# Allegro board ASR6601QFN48_Module_V10_210527.brd
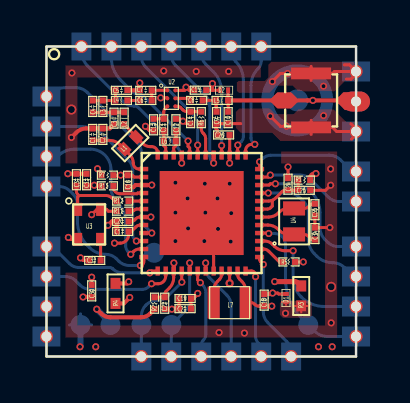
[diagram p0: board, top side]
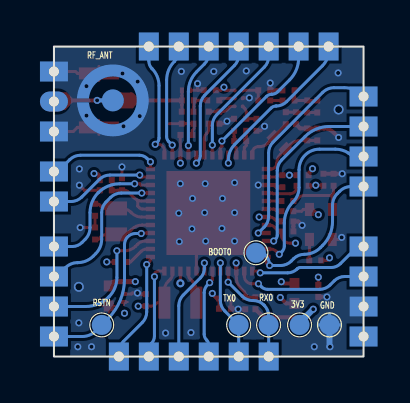
[diagram p1: board, bottom side, seen from below]

Outline 15.5 x 15.5 mm; copper layers: TOP, GND, VCC, BOTTOM. Coordinates in mm from the lower left corner of the outline.
Outline path: rectangle 0,0 15.5,15.5

## Placement (name value [footprint] x y rotation side)
C1  47nF  [C0201]  2.32 11.1 270 top
C2  82pF  [C0201]  2.82 11.1 270 top
C3  9.0pF  [C0201]  3.38 11.92 90 top
C4  3.9pF  [C0201]  2.32 12.5 90 top
C5  12pF  [C0201]  3.75 13.31 0 top
C6  100pF  [C0201]  4.97 12.8 0 top
C7  4.7pF  [C0201]  4.97 13.31 0 top
C8  100pF  [C0201]  7.52 12.81 0 top
C9  NC  [C0201]  8.51 11.94 90 top
C10  NC  [C0201]  9.1 11.94 90 top
C11  4.7pF  [C0201]  5.87 11.59 90 top
C12  3.9pF  [C0201]  6.48 11.59 90 top
C13  1pF  [C0201]  5.36 11.59 90 top
C14  100pF  [C0201]  7.22 11.94 270 top
C15  100pF  [C0201]  7.7 13.31 180 top
C16  0.1uF  [C0201]  4.07 8.76 270 top
C17  0.1uF  [C0201]  3.81 6.25 180 top
C18  0.47uF  [C0201]  10.9 2.82 90 top
C19  0.1uF  [C0201]  6.94 2.9 0 top
C20  0.1uF  [C0201]  3.81 6.76 0 top
C21  2.2uF  [C0201]  6.94 2.39 0 top
C22  0.1uF  [C0201]  5.92 2.67 90 top
C24  0.01uF  [C0201]  12.09 8.61 90 top
C25  2.2uF  [C0201]  12.91 8.31 0 top
C26  0.1uF  [C0201]  8.87 11.08 0 top
C30  0R(0.1uF)  [C0201]  2.26 3.28 270 top
C31  NC(10pF)  [C0201]  1.5 8.84 90 top
C32  0R  [C0201]  2.42 4.8 180 top
C33  NC(10pF)  [C0201]  2.01 8.84 90 top
C34  NC(10pF)  [C0201]  13.44 6.15 90 top
C35  NC(10pF)  [C0201]  13.44 7.34 90 top
D1  PESD3V3Z1BSF  [DSN0603_2N_MM]  11.99 2.92 270 top
D2  PESD5V0H1BSF  [DSN0603_2N_MM]  8.89 13.31 0 top
J1  -  [IPEX]  13.25 12.8 180 top
J2  HDR  [ASR6601QFN48_1600X1600_30N3_MM]  7.75 7.75 0 top
L1  56nH  [L0402]  4.2 10.67 225 top
L2  1.8nH  [L0201]  3.89 11.92 90 top
L3  7.5nH  [L0201]  2.82 12.5 90 top
L4  15nH  [L0201]  3.75 12.8 0 top
L5  0R  [L0201]  8.79 12.81 0 top
L6  33nH  [L0201]  6.18 10.77 180 top
L7  15uH  [L2016]  9.17 2.69 0 top
R1  0R  [R0201]  12.91 8.82 180 top
R2  0R  [R0201]  5.41 2.67 90 top
R3  0R  [R0402]  12.75 3.03 90 top
R4  0R  [R0402]  3.46 3.15 270 top
R5  100R  [R0201]  12.14 4.73 0 top
R6  100R  [R0201]  7.75 11.94 270 top
R7  NC(0R)  [R0201]  3.05 9.07 180 top
R11  NC(0R)  [R0201]  3.81 7.26 0 top
R12  0R  [R0201]  3.81 7.77 0 top
R13  0R  [R0201]  3.05 8.53 0 top
TP1  TP  [TP_SMD180CR120_110C_MM]  12.55 12.81 0 bottom
TP2  TP_1MM  [TP_SMD100C100_MM]  3.2 1.58 180 bottom
TP3  TP_1MM  [TP_SMD100C100_MM]  1.71 1.58 180 bottom
TP4  TP_1MM  [TP_SMD100C100_MM]  5.39 5.19 180 bottom
TP5  TP_1MM  [TP_SMD100C100_MM]  13.11 1.58 180 bottom
TP6  TP_1MM  [TP_SMD100C100_MM]  4.75 1.58 180 bottom
TP7  TP_1MM  [TP_SMD100C100_MM]  6.25 1.58 180 bottom
U1  ASR6601QFN48  [ASR6501_QFN40P_600X600_48N_MM]  7.77 7.17 180 top
U2  XMSSJR6G0BA-093  [QFN40P_110X70_6N_MM]  6.25 12.91 0 top
U3  TCXO/XO_32M  [OSC_SMD200X160_4N_MM]  2.14 6.6 270 top
U4  XO_32.768K  [XTAL_SMD160X100_2N_MM]  12.4 6.76 90 top

## Library data of the parts
C1-C22 C24-C26 C30-C35 = RCL_CAP_NP
D1 D2 = TVS-BI
J1 = UFLR_0
J2 = CN_10
L1-L7 = RCL_IND
R1-R7 R11-R13 = RCL_RES
TP1 = UFLR_1
TP2-TP7 = TP_SMT
U1 = ASR6505_9
U2 = MXD8625C_0
U3 = TCXO_32M
U4 = XO

## Footprints (pads in the part's own frame, mm; a bottom-side part is the same pattern mirrored in y, then rotated)
ASR6501_QFN40P_600X600_48N_MM
  rect 0.45x0.22 smd: 1(2.9,-2.2) 2(2.9,-1.8) 3(2.9,-1.4) 4(2.9,-1) 5(2.9,-0.6) 6(2.9,-0.2) 7(2.9,0.2) 8(2.9,0.6) 9(2.9,1) 10(2.9,1.4) 11(2.9,1.8) 12(2.9,2.2) 25(-2.9,2.2) 26(-2.9,1.8) 27(-2.9,1.4) 28(-2.9,1) 29(-2.9,0.6) 30(-2.9,0.2) 31(-2.9,-0.2) 32(-2.9,-0.6) 33(-2.9,-1) 34(-2.9,-1.4) 35(-2.9,-1.8) 36(-2.9,-2.2)
  rect 0.22x0.45 smd: 13(2.2,2.9) 14(1.8,2.9) 15(1.4,2.9) 16(1,2.9) 17(0.6,2.9) 18(0.2,2.9) 19(-0.2,2.9) 20(-0.6,2.9) 21(-1,2.9) 22(-1.4,2.9) 23(-1.8,2.9) 24(-2.2,2.9) 37(-2.2,-2.9) 38(-1.8,-2.9) 39(-1.4,-2.9) 40(-1,-2.9) 41(-0.6,-2.9) 42(-0.2,-2.9) 43(0.2,-2.9) 44(0.6,-2.9) 45(1,-2.9) 46(1.4,-2.9) 47(1.8,-2.9) 48(2.2,-2.9)
  rect 4.2x4.2 smd: 49(0,0)
ASR6601QFN48_1600X1600_30N3_MM
  round 0.65 hole 0.5: 1(-6,7.75) 2(-4.5,7.75) 3(-3,7.75) 4(-1.5,7.75) 5(0,7.75) 6(1.5,7.75) 7(3,7.75) 8(7.75,6.5) 10(7.75,3.5) 11(7.75,1.5) 12(7.75,0) 13(7.75,-2.25) 14(7.75,-3.75) 15(7.75,-5.25) 16(7.75,-6.75) 17(4.5,-7.75) 18(3,-7.75) 19(1.5,-7.75) 20(0,-7.75) 21(-1.5,-7.75) 22(-3,-7.75) 23(-7.75,-6.75) 24(-7.75,-5.25) 25(-7.75,-3.75) 26(-7.75,-2.25) 27(-7.75,0.75) 28(-7.75,2.25) 29(-7.75,3.75) 30(-7.75,5.25)
  oval 1.4x1 hole 0.5: 9(7.75,5)
C0201
  rect 0.3x0.3 smd: 1(-0.3,0) 2(0.3,0)
DSN0603_2N_MM
  rect 0.2x0.28 smd: 1(-0.2,0) 2(0.2,0)
IPEX
  rect 2x0.6 smd: 1(0,1.35) 2(0,-1.35)
  rect 0.7x0.8 smd: 3(1.35,0)
L0201
  rect 0.3x0.3 smd: 1(-0.3,0) 2(0.3,0)
L0402
  rect 0.47x0.58 smd: 1(-0.425,0) 2(0.425,0)
L2016
  rect 0.6x1.6 smd: 1(-0.8,0) 2(0.8,0)
OSC_SMD200X160_4N_MM
  rect 0.65x0.45 smd: 1(-0.75,-0.575) 2(0.75,-0.575) 3(0.75,0.575) 4(-0.75,0.575)
QFN40P_110X70_6N_MM
  round 0.2 smd: 1(-0.2,0.4) 2(-0.2,0) 3(-0.2,-0.4) 4(0.2,-0.4) 5(0.2,0) 6(0.2,0.4)
R0201
  rect 0.3x0.3 smd: 1(-0.3,0) 2(0.3,0)
R0402
  rect 0.55x0.5 smd: 1(-0.5,0) 2(0.5,0)
TP_SMD100C100_MM
  round 1 smd: 1(0,0)
TP_SMD180CR120_110C_MM
  round 1.1 smd: 1(0,0)
  custom 3.597x3.6 smd: 2(0,0)
XTAL_SMD160X100_2N_MM
  rect 0.7x1.1 smd: 1(-0.65,0) 2(0.65,0)

## Nets
GND: C1.1 C2.1 C3.1 C5.2 C7.1 C9.1 C10.1 C12.2 C13.1 C14.2 C15.1 C16.2 C17.2 C18.2 C19.1 C20.1 C21.1 C22.1 C24.2 C25.2 C26.1 C30.2 C31.2 C33.2 C34.2 C35.1 D1.1 D2.1 J1.1 J1.2 J2.8 J2.10 J2.24 TP1.2 TP3.1(TP) U1.3(GND_PLL) U1.20(GND_DCC) U1.49(GND) U2.2(GND) U3.2(GND#2)
VCC_3V3: D1.2 J2.23 R1.1 R2.1 R3.1 TP2.1(TP)
VDD_IN: C16.1 R4.1 R7.1 U1.2(VDD_IN)
VDD_RF: C19.2 C20.2 C21.2 R3.2 R4.2 U1.7(VBAT_RF) U1.22(VBAT_DCC)
VDDA: C24.1 C25.1 R1.2 U1.31(VBAT_RTC) U1.32(VBAT_ANA)
VDDD: C22.2 C26.2 R2.2 U1.15(VBAT_ESD0) U1.39(VBAT_ESD3)
ANT_SW_CTRL: R5.1 U1.26(GPIO59/LORAC_RF_SW)
GPIO00: J2.29 U1.10(GPIO00/SPI_CLK)
GPIO01: J2.30 U1.9(GPIO01/SPI_SEL)
GPIO02: J2.27 TP4.1(TP) U1.12(GPIO02/SPI_MISO)
GPIO03: J2.28 U1.11(GPIO03/SPI_MOSI)
GPIO04: J2.11 U1.36(GPIO04/UART1_TX)
GPIO05: J2.12 U1.35(GPIO05/UART1_RX)
GPIO06: J2.26 U1.13(GPIO06/SWD_DAT)
GPIO07: J2.25 U1.14(GPIO07/SWD_CLK)
GPIO08: J2.13 U1.34(GPIO08/ADC_IN1)
GPIO09: J2.7 U1.37(GPIO09/DAC_OUT)
GPIO10: R6.2 U1.42(GPIO10/OPA0_OUT)
GPIO11: J2.14 U1.33(GPIO11/ADC_IN0)
GPIO14: J2.20 U1.18(GPIO14/I2C_CLK)
GPIO15: J2.19 U1.19(GPIO15/I2C_DAT)
GPIO16: J2.22 TP6.1(TP) U1.16(GPIO16/UART0_RX)
GPIO17: J2.21 TP7.1(TP) U1.17(GPIO17/UART0_TX)
GPIO32: J2.1 U1.45(GPIO32/COMP1_OUT)
GPIO33: J2.2 U1.44(GPIO33/COMP1_INN)
GPIO37: J2.3 U1.43(GPIO37/COMP1_INP)
GPIO44: J2.4 U1.41(GPIO44/OPA0_INN)
GPIO45: J2.5 U1.40(GPIO45/OPA0_INP)
GPIO47: J2.6 U1.38(GPIO47/LPUART_TX)
GPIO58: J2.15 U1.27(GPIO58/LP_TIMER)
GPIO60: J2.17 U1.25(GPIO60/LPUART_RX)
GPIO62: J2.18 U1.24(GPIO62/WKUP)
PWR_TCXO: R11.2 U1.6(PWR_TCXO)
RF_ANT: C10.2 D2.2 J1.3 J2.9 L5.2 TP1.1
RFI_N: C11.1 L6.2 U1.47(RFI_N)
RFI_P: C12.1 L6.1 U1.46(RFI_P)
RFO: L1.1 L2.1 U1.48(RFO)
RSTN: J2.16 TP5.1(TP) U1.28(RSTN)
VR_PA: C1.2 C2.2 L1.2 U1.1(VR_PA)
VREG: C17.1 C18.1 L7.2 R7.2 U1.8(VDCC_RF) U1.23(VREG)
XO32K_IN: C34.1 U1.29(XO32K_IN) U4.1(XTA)
XO32K_OUT: C35.2 U1.30(XO32K_OUT) U4.2(XTB)
XTA: R13.2 U1.4(XTA)
XTB: R12.2 U1.5(XTB)
N16688294: C30.1 R11.1 U3.4(VCC)
N16688298: C31.1 R12.1 U3.1(GND#1)
N16688382: C32.2 C33.1 R13.1
N16688514: C32.1 U3.3(VOUT)
N16776961: L7.1 U1.21(DCC_SW)
N16801239: C8.2 C9.2 L5.1
N16801249: C11.2 C13.2 U2.3(RF1)
N16801277: C6.2 C7.2 U2.1(RF2)
N16801301: C15.2 R5.2 U2.6(V1)
N16801306: C3.2 C4.1 L2.2 L3.1
N16801308: C4.2 C5.1 L3.2 L4.1
N16801347: C14.1 R6.1 U2.4(VDD)
N16801468: C8.1 U2.5(ANT)
N16801497: C6.1 L4.2

## Via types
v1: diameter 0.356, hole 0.203, TOP to BOTTOM, 93 vias
v2: diameter 0.406, hole 0.203, TOP to BOTTOM, 1 via
v3: diameter 0.5, hole 0.35, TOP to BOTTOM, 2 vias

## Routing (per net, layer and track width the routed paths; a pad name or vN(x,y) marks a point on that pad's centre or on a via; arc(x,y) is an arc through that point)
GND: length 42.1
  TOP w0.15: J2.8 15.5,14.13 15.24,13.87 15.02,13.87 ; J2.8 14.42,14.25 14.32,14.15 J1.2 ; J2.8 15.17,14.58 14.91,14.58 ; 8.31,13.31 D2.1 ; 8.31,13.31 v1(8.31,13.64) ; 8.31,13.31 C15.1 ; J2.10 15.5,11.38 15.24,11.64 ; J2.10 15.5,11.11 15.27,10.88 ; J2.10 14.53,11.25 14.32,11.46 J1.1 ; U2.2 6.03,12.93 v1(5.72,12.93) ; D1.1 11.62,3.12 11.58,3.17 v1(11.32,3.17) ; 13.25,13.8 J1.2 ; J1.2 12.07,14.15 v1(12.07,14.15) 11.71,14.15 v1(11.31,13.75) ; J1.2 13.25,14.51 ; v1(14.19,6.45) C34.2 C35.1 ; v1(4.96,11.51) 4.96,11.49 5.16,11.29 C13.1 ; C14.2 7.03,11.64 arc(6.96,11.66) 6.91,11.69 v1(6.84,11.76) 6.76,11.84 arc(6.71,11.87) 6.64,11.89 C12.2 ; U1.20 8.37,4.99 arc(8.31,5.28) 8.15,5.52 v1(7.9,5.77) ; v1(1.1,5.95) 1.2,5.85 U3.2 ; J1.1 13.25,11.81 ; J1.1 13.25,11.1 ; J1.1 12.07,11.46 v1(12.02,11.51) 11.71,11.51 v1(11.21,12.02) ; C19.1 C21.1 6.41,2.39 6.39,2.37 v1(6.28,2.37) C22.1 ; C24.2 v1(12.09,9.48) ; C26.1 8.57,11.3 8.49,11.38 8.49,11.64 C9.1 C10.1 9.73,11.64 ; C25.2 13.97,8.31 v1(14.23,8.56)
  TOP w0.2: v1(1.07,9.14) C31.2 C33.2 ; v1(1.25,10.95) 1.5,11.2 arc(1.72,11.35) 1.99,11.4 C1.1 C2.1 3.17,11.4 C3.1 ; v1(11.32,3.17) 11.27,3.12 C18.2 ; C17.2 3.51,6.5 3.51,6.5 C20.1 3.28,6.76 v1(3.08,6.56) ; v1(4.67,13.67) C7.1 C5.2 ; v1(1.83,2.98) 1.84,2.98 C30.2 ; C16.2 4.35,8.46 4.46,8.57 U1.3 v1(5.27,8.57)
  GND w0.15: 0.51,1.99 0,2.5 J2.24 0.01,2.5 ; 0.01,2.5 0.78,2.5 ; 0.01,2.5 0.54,3.03 ; 15.49,14.25 14.71,14.25 ; 15.49,14.25 J2.8 15.5,14.25 14.99,14.76 ; 15.49,14.25 14.94,13.69 ; 15.49,11.25 14.56,11.25 ; 15.49,11.25 J2.10 15.5,11.25 14.86,11.89 ; 15.49,11.25 14.81,10.57
  BOTTOM w0.15: 1.15,1.58 TP3.1 ; TP3.1 2.26,1.58 ; TP3.1 1.71,2.13
  BOTTOM w0.3: TP3.1 1.71,0.49 v1(1.68,0.49)
  vias: v1(1.27,14.18) v1(2.47,0.49) v1(5.87,14.28) v1(6.46,8.69) v1(6.46,7.19) v1(6.46,5.77) v1(7.07,7.9) v1(7.09,6.4) v1(7.5,14.25) v1(7.93,8.64) v1(7.95,7.19) v1(8.56,7.9) v1(8.59,6.38) v1(8.64,1.2) v1(9.12,14.25) v1(9.17,8.64) v1(9.25,7.17) v1(9.22,5.74) v1(9.91,1.17) v1(13.62,0.49) v1(13.87,13.52) v1(13.87,12.04) v1(14.23,9.38) v1(14.25,1.68) v1(14.3,0.49) v3(1.25,12.35) v3(14.25,3.48)
VCC_3V3: length 27.9
  TOP w0.1: 12.45,2.53 R3.1 ; R3.1 12.75,2.2 ; R3.1 13.06,2.53 ; 11.8,2.73 11.99,2.73 ; 11.99,2.73 11.99,2.57 ; 11.99,2.73 12.18,2.73
  TOP w0.2: v1(2.52,2.37) 2.74,2.15 arc(2.95,2.01) 3.19,1.96 4.74,1.96 arc(4.99,2.01) 5.2,2.15 R2.1 ; v1(13.49,9.15) 13.41,9.15 arc(13.27,9.09) 13.21,8.95 R1.1
  VCC w0.3: 11.97,1.67 11.94,1.71 2.52,1.71 ; 11.97,1.67 11.97,1.83 11.97,1.84 v1(11.97,2.16) ; 11.97,1.67 arc(12.48,1.78) 12.91,2.06 13.04,2.2 arc(13.37,2.69) 13.49,3.28 v1(13.49,9.15) ; 2.52,1.71 v1(2.52,2.37) ; 2.52,1.71 1.99,1.71 arc(1.47,1.6) 1.03,1.31 0.95,1.23 arc(0.7,1.06) 0.39,1 J2.23
  BOTTOM w0.3: v1(2.52,2.37) 2.9,1.99 2.92,1.99 3.12,1.79 arc(3.18,1.69) TP2.1
VDD_IN: length 8
  TOP w0.15: R7.1 v1(3.71,9.07) 3.72,9.06 C16.1 4.29,9.06 4.38,8.97 U1.2
  TOP w0.2: v1(4.12,3.74) 4.03,3.65 R4.1
  VCC w0.2: v1(3.71,9.07) 3.89,8.89 arc(4,8.72) 4.04,8.52 4.04,5.88 arc(3.99,5.64) 3.85,5.43 3.83,5.4 arc(3.69,5.19) 3.64,4.94 3.64,4.54 arc(3.7,4.24) 3.86,3.99 v1(4.12,3.74)
VDD_RF: length 17.1
  TOP w0.15: C20.2 4.24,6.76 arc(4.33,6.77) 4.41,6.82 4.46,6.87 arc(4.57,6.95) 4.69,6.97 U1.7 v1(5.23,6.97) ; C21.2 C19.2 7.36,2.9 7.57,3.11 v1(7.57,3.15) ; U1.22 v2(9.17,3.66)
  TOP w0.2: R4.2 3.87,2.65 v1(4.17,2.95)
  TOP w0.25: R3.2 12.63,3.65 arc(12.53,3.72) 12.41,3.74 v1(11.43,3.74)
  VCC w0.2: 9.17,3.15 10.14,3.15 arc(10.44,3.21) 10.7,3.39 10.94,3.63 arc(11.07,3.71) 11.22,3.74 v1(11.43,3.74) ; 9.17,3.15 v1(7.57,3.15) 5.8,3.15 ; 9.17,3.15 9.17,3.36 9.17,3.36 v2(9.17,3.66) ; v1(5.23,6.97) 5.55,6.65 arc(5.73,6.38) 5.8,6.06 5.8,3.15 ; 5.8,3.15 4.5,3.15 arc(4.38,3.13) 4.29,3.07 v1(4.17,2.95)
VDDA: length 3.6
  TOP w0.15: R1.2 C25.1 12.32,8.31 12.32,8.31 C24.1 11.97,8.31 arc(11.88,8.3) 11.8,8.25 11.5,7.94 arc(11.4,7.86) 11.28,7.8 ; U1.32 11.13,7.77 arc(11.21,7.78) 11.28,7.8 ; U1.31 11.07,7.37 arc(11.15,7.39) 11.22,7.44 11.31,7.52 11.31,7.78 11.28,7.8
VDDD: length 12.9
  TOP w0.15: R2.2 C22.2 5.92,3.09 arc(5.94,3.18) 5.99,3.26 6.16,3.43 arc(6.31,3.66) 6.37,3.94 U1.15 ; C26.2 9.17,11.07 9.17,10.38 9.17,10.37 U1.39 v1(9.17,9.67)
  TOP w0.2: v1(6.38,4.68) 6.38,4.28 U1.15
  VCC w0.2: v1(9.17,9.67) 9.45,9.67 9.46,9.69 9.75,9.69 arc(10.15,9.52) 10.32,9.12 10.32,6.16 arc(10.24,5.8) 10.04,5.49 10.01,5.46 arc(9.7,5.26) 9.34,5.19 7.23,5.19 arc(6.91,5.12) 6.65,4.95 v1(6.38,4.68)
ANT_SW_CTRL: length 1.4
  TOP w0.15: R5.1 11.66,4.73 11.13,5.26 arc(11.01,5.34) 10.86,5.37 U1.26
GPIO00: length 9.5
  TOP w0.15: U1.10 v1(4.5,5.77)
  BOTTOM w0.15: v1(4.5,5.77) 4.4,5.87 arc(4.34,5.96) 4.32,6.06 4.32,9.3 arc(4.26,9.58) 4.1,9.83 2.93,11 arc(2.37,11.37) 1.72,11.5 J2.29 -0.25,11.5
GPIO01: length 10.9
  TOP w0.15: U1.9 v1(5.27,6.17)
  BOTTOM w0.15: J2.30 0.07,13.07 arc(0.48,13.34) 0.97,13.44 1.48,13.44 arc(1.78,13.38) 2.04,13.21 4.53,10.71 arc(4.7,10.47) 4.75,10.18 4.75,7 arc(4.81,6.72) 4.97,6.47 v1(5.27,6.17)
GPIO02: length 8.8
  TOP w0.15: U1.12 4.87,4.72 arc(4.82,4.6) 4.7,4.55 v1(4.7,4.55)
  BOTTOM w0.15: TP4.1 5.18,5.19 arc(5.04,5.16) 4.92,5.08 4.92,5.08 arc(4.76,4.84) v1(4.7,4.55) 4.15,4.55 arc(3.86,4.61) 3.62,4.77 3.5,4.89 arc(3.26,5.05) 2.97,5.11 arc(2.53,5.2) 2.16,5.45 2.05,5.55 arc(1.68,6.1) 1.55,6.75 1.55,7.57 arc(1.49,7.88) 1.32,8.14 1.2,8.26 arc(0.93,8.44) 0.62,8.5 J2.27
GPIO03: length 9.2
  TOP w0.15: U1.11 4.66,5.37 arc(4.5,5.34) 4.36,5.25 v1(4.22,5.11)
  BOTTOM w0.15: J2.28 0.34,10 arc(0.56,10.04) 0.74,10.16 arc(1.06,10.32) 1.41,10.37 2.2,10.37 arc(2.93,10.07) 3.23,9.34 3.23,8.45 arc(3.31,8.06) 3.53,7.73 arc(3.85,7.25) 3.97,6.67 3.97,5.53 arc(4,5.38) 4.08,5.25 v1(4.22,5.11)
GPIO04: length 5.6
  TOP w0.15: v1(10.67,9.73) U1.36
  BOTTOM w0.15: v1(10.67,9.73) 10.85,9.91 arc(11.02,10.02) 11.22,10.06 14.18,10.06 arc(14.46,10.01) 14.71,9.84 15.3,9.25 J2.11
GPIO05: length 5.4
  TOP w0.15: U1.35 11.11,8.97 v1(11.21,9.07)
  BOTTOM w0.15: v1(11.21,9.07) 12.7,9.07 arc(12.99,9.01) 13.23,8.85 14.11,7.97 arc(14.35,7.81) 14.64,7.75 J2.12
GPIO06: length 6.1
  TOP w0.15: U1.13 5.26,4.27 v1(5.17,4.18)
  BOTTOM w0.15: J2.26 0.17,5.5 arc(0.29,5.48) 0.39,5.41 1.16,4.64 arc(1.37,4.5) 1.62,4.45 3.16,4.45 arc(3.25,4.43) 3.32,4.38 arc(3.54,4.23) 3.8,4.18 v1(5.17,4.18)
GPIO07: length 6.7
  TOP w0.15: U1.14 5.97,4.02 arc(5.86,3.75) 5.59,3.64 v1(5.26,3.64)
  BOTTOM w0.15: v1(5.26,3.64) 5.11,3.49 arc(4.97,3.39) 4.8,3.36 2.2,3.36 arc(1.92,3.41) 1.67,3.58 1.47,3.78 arc(1.23,3.94) 0.94,4 J2.25
GPIO08: length 6.9
  TOP w0.15: v1(11.46,8.64) 11.21,8.64 11.15,8.57 U1.34
  BOTTOM w0.15: v1(11.46,8.64) 12.2,8.64 arc(12.79,8.52) 13.28,8.19 arc(13.59,7.73) 13.69,7.19 13.69,6.44 arc(13.76,6.13) 13.94,5.86 14.09,5.7 arc(14.32,5.55) 14.58,5.5 J2.13
GPIO09: length 6
  TOP w0.15: v1(10.43,10.61) 10.28,10.61 arc(10.06,10.52) 9.97,10.3 U1.37
  BOTTOM w0.15: J2.7 10.75,14.78 arc(10.71,14.57) 10.59,14.39 arc(10.33,14) 10.24,13.54 10.24,10.92 arc(10.26,10.81) 10.32,10.71 v1(10.43,10.61)
GPIO10: length 1.6
  TOP w0.15: U1.42 7.97,10.9 arc(7.94,11.03) 7.87,11.14 7.85,11.16 arc(7.78,11.27) 7.75,11.4 R6.2
GPIO11: length 7.6
  TOP w0.15: v1(11.1,8.17) U1.33
  BOTTOM w0.15: v1(11.1,8.17) 12.13,8.17 arc(12.42,8.12) 12.66,7.95 12.89,7.73 arc(13.05,7.48) 13.11,7.2 13.11,5.86 arc(13.19,5.47) 13.41,5.14 13.53,5.02 arc(13.89,4.78) 14.31,4.69 14.32,4.69 arc(14.64,4.63) 14.92,4.44 15.36,4 J2.14
GPIO14: length 4.5
  TOP w0.15: v1(7.7,3.69) 7.68,3.72 7.57,3.83 U1.18
  BOTTOM w0.15: v1(7.7,3.69) 7.82,3.58 arc(7.94,3.4) 7.98,3.19 7.98,1.12 arc(7.95,0.96) 7.85,0.82 arc(7.78,0.7) 7.75,0.57 J2.20
GPIO15: length 5.5
  TOP w0.15: U1.19 v1(7.97,4.68)
  BOTTOM w0.15: J2.19 9.25,2.54 arc(9.19,2.82) 9.03,3.07 8.16,3.93 arc(8.02,4.15) 7.97,4.4 v1(7.97,4.68)
GPIO16: length 5.4
  TOP w0.15: U1.16 6.77,3.73 v1(6.78,3.72)
  BOTTOM w0.15: J2.22 4.75,1.1 4.75,1.1 TP6.1 4.75,2.03 arc(4.81,2.32) 4.97,2.56 4.99,2.58 arc(5.23,2.74) 5.52,2.8 5.55,2.8 arc(5.83,2.85) 6.08,3.02 v1(6.78,3.72)
GPIO17: length 5.4
  TOP w0.15: v1(7.17,4.68) U1.17
  BOTTOM w0.15: v1(7.17,4.68) 7.17,2.81 arc(7.11,2.52) 6.95,2.28 TP7.1 6.25,1.1 6.25,1.1 J2.21
GPIO32: length 8.4
  TOP w0.15: v1(6.77,9.67) U1.45
  BOTTOM w0.15: J2.1 1.75,15.29 arc(1.83,14.88) 2.06,14.53 3.85,12.74 arc(4.09,12.58) 4.38,12.52 arc(4.52,12.5) 4.63,12.42 6.45,10.6 arc(6.69,10.25) 6.77,9.83 v1(6.77,9.67)
GPIO33: length 7.1
  TOP w0.15: v1(7.09,10.77) 7.09,10.5 7.17,10.42 U1.44
  BOTTOM w0.15: J2.2 3.25,14.92 arc(3.37,14.33) 3.7,13.83 4.3,13.24 arc(4.44,13.14) 4.6,13.11 arc(4.74,13.08) 4.86,13 v1(7.09,10.77)
GPIO37: length 6.5
  TOP w0.15: U1.43 v1(7.57,10.57)
  BOTTOM w0.15: v1(7.57,10.57) 7.57,11.56 arc(7.51,11.85) 7.35,12.09 4.97,14.47 arc(4.81,14.71) 4.75,15 J2.3
GPIO44: length 7
  TOP w0.15: U1.41 v1(8.37,9.67)
  BOTTOM w0.15: J2.4 6.25,15.07 arc(6.31,14.79) 6.47,14.54 7.95,13.06 arc(8.12,12.82) 8.17,12.53 8.17,10.04 arc(8.2,9.88) 8.29,9.75 8.37,9.67 v1(8.37,9.67)
GPIO45: length 5.8
  TOP w0.15: v1(8.77,10.54) U1.40
  BOTTOM w0.15: J2.5 7.75,15.15 arc(7.81,14.86) 7.97,14.62 8.36,14.23 arc(8.66,13.78) 8.77,13.24 v1(8.77,10.54)
GPIO47: length 5.7
  TOP w0.15: v1(9.58,10.57) 9.57,10.56 U1.38
  BOTTOM w0.15: v1(9.58,10.57) 9.76,10.75 arc(9.83,10.86) 9.86,11 9.86,13.82 arc(9.76,14.32) 9.47,14.76 arc(9.31,15) 9.25,15.29 J2.6
GPIO58: length 7.1
  TOP w0.15: v1(12.35,5.29) 11.95,5.29 arc(11.66,5.34) 11.42,5.51 11.31,5.61 arc(11.13,5.73) 10.93,5.77 U1.27
  BOTTOM w0.15: v1(12.35,5.29) 12.35,3.95 arc(12.45,3.43) 12.75,2.98 arc(13.28,2.63) 13.91,2.5 J2.15
GPIO60: length 5.6
  TOP w0.15: v1(10.86,4.6) 10.72,4.73 arc(10.68,4.79) 10.67,4.87 U1.25
  BOTTOM w0.15: v1(10.86,4.6) 10.86,2.23 arc(10.91,1.94) 11.08,1.7 12.03,0.74 arc(12.19,0.5) 12.25,0.21 J2.17
GPIO62: length 4.8
  TOP w0.15: v1(10.47,3.99) 10.47,4.07 arc(10.41,4.21) 10.26,4.27 U1.24
  BOTTOM w0.15: J2.18 10.75,0.34 arc(10.72,0.51) 10.62,0.66 10.62,0.66 arc(10.51,0.82) 10.47,1.02 v1(10.47,3.99)
PWR_TCXO: length 0.8
  TOP w0.15: U1.6 4.51,7.37 arc(4.45,7.36) 4.4,7.33 4.38,7.31 arc(4.33,7.27) 4.28,7.26 R11.2
RF_ANT: length 8.3
  TOP w0.15: D2.2 9.09,13.03 9.09,13.03 L5.2 9.09,12.58 9.1,12.58 C10.2
  TOP w0.2: J2.9 15.44,12.81 v1(13.34,12.81) 13.06,12.81 13.06,12.8 J1.3 11.36,12.8 L5.2
  BOTTOM w0.2: TP1.1 v1(13.34,12.81)
RFI_N: length 1.3
  TOP w0.15: U1.47 5.97,10.45 5.88,10.54 L6.2 5.88,10.99 5.87,11 C11.1
RFI_P: length 1.3
  TOP w0.15: U1.46 6.37,10.44 6.48,10.54 L6.1 6.48,10.99 6.48,11 C12.1
RFO: length 2.4
  TOP w0.15: L2.1 3.96,11.55 3.96,11.54 L1.1 4.82,10.65 arc(4.99,10.53) 5.19,10.49 5.26,10.49 arc(5.48,10.4) 5.57,10.19 U1.48
RSTN: length 8.6
  TOP w0.15: v1(11.13,6.15) 11.11,6.17 U1.28
  BOTTOM w0.15: J2.16 14.08,1 arc(13.72,1.07) 13.41,1.28 TP5.1 12.79,1.9 arc(12.18,2.81) 11.97,3.88 11.97,5.59 arc(11.8,5.99) 11.41,6.15 v1(11.13,6.15)
VR_PA: length 3.3
  TOP w0.15: U1.1 4.63,9.37 arc(4.43,9.46) 4.35,9.66 arc(4.3,9.9) 4.17,10.1 L1.2 3.67,10.6 arc(3.44,10.75) 3.17,10.8 C2.2 C1.2
VREG: length 21.1
  TOP w0.15: v1(2.56,9.39) 2.75,9.19 2.75,9.07 ; L7.2 9.97,3.3 arc(9.92,3.55) 9.78,3.76 9.67,3.87 arc(9.59,3.98) 9.57,4.11 U1.23 ; L7.2 9.97,2.56 ; L7.2 10.24,2.69 arc(10.34,2.67) 10.42,2.62 10.44,2.59 arc(10.53,2.54) 10.63,2.52 C18.1 ; U1.8 4.7,6.57 arc(4.58,6.55) 4.47,6.48 4.25,6.25 C17.1 4.11,6.09 arc(3.99,5.79) 3.69,5.67 v1(3.41,5.67)
  TOP w0.2: C18.1 v1(11.28,2.52)
  VCC w0.2: v1(2.56,9.39) 3.31,8.63 arc(3.53,8.31) 3.6,7.93 3.6,5.98 arc(3.58,5.87) 3.52,5.78 v1(3.41,5.67) 3.23,5.5 arc(3.12,5.32) 3.08,5.12 3.08,3.3 arc(3.14,2.98) 3.33,2.7 3.43,2.59 arc(3.66,2.44) 3.92,2.39 4.83,2.39 arc(5.09,2.44) 5.31,2.59 5.34,2.62 arc(5.48,2.71) 5.64,2.75 6.64,2.75 arc(6.77,2.72) 6.89,2.65 6.92,2.62 arc(7.03,2.54) 7.15,2.52 v1(11.28,2.52)
XO32K_IN: length 3
  TOP w0.15: C34.1 13.29,5.85 13.15,5.99 arc(13.02,6.07) 12.86,6.11 U4.1 12.11,6.11 arc(11.88,6.15) 11.68,6.29 11.61,6.35 arc(11.37,6.52) 11.08,6.57 U1.29
XO32K_OUT: length 3
  TOP w0.15: U1.30 11.12,6.97 arc(11.39,7.03) 11.61,7.18 11.65,7.22 arc(11.86,7.36) 12.1,7.41 U4.2 12.89,7.41 arc(13.03,7.43) 13.15,7.51 13.23,7.59 arc(13.28,7.63) 13.34,7.64 C35.2
XTA: length 1.8
  TOP w0.15: U1.4 4.57,8.17 4.53,8.14 3.68,8.14 arc(3.45,8.23) 3.35,8.47 R13.2
XTB: length 0.8
  TOP w0.15: R12.2 4.34,7.77 4.34,7.77 U1.5
N16688294: length 4.9
  TOP w0.15: v1(2.26,7.09) 2.53,7.35 U3.4 3.01,7.35 3.1,7.26 R11.1 ; C30.1 v1(2.26,3.97)
  VCC w0.2: v1(2.26,3.97) v1(2.26,7.09)
N16688298: length 3.2
  TOP w0.15: R12.1 3.43,7.77 3.28,7.92 arc(3.14,8.02) 2.97,8.05 1.64,8.05 1.63,8.04 ; U3.1 1.56,7.97 1.63,8.04 ; 1.63,8.04 1.55,8.12 arc(1.52,8.17) 1.5,8.24 C31.1
N16688382: length 5.1
  TOP w0.15: v1(1.71,4.93) 1.83,4.8 C32.2 ; C33.1 2.04,8.56 v1(2.39,8.56) 2.42,8.53 2.75,8.53
  VCC w0.2: v1(1.71,4.93) 1.71,7.46 arc(1.78,7.85) 2,8.17 v1(2.39,8.56)
N16688514: length 1.1
  TOP w0.15: U3.3 2.71,5.04 2.72,5.03 2.72,4.8
N16776961: length 1.8
  TOP w0.15: 8.37,2.56 L7.1 8.37,3.3 arc(8.42,3.55) 8.56,3.75 8.67,3.86 arc(8.74,3.97) 8.77,4.1 U1.21
N16801239: length 1.2
  TOP w0.15: C8.2 L5.1 8.49,12.49 8.51,12.47 C9.2
N16801249: length 1.2
  TOP w0.15: C13.2 C11.2 5.87,12.21 arc(5.89,12.32) 5.95,12.41 U2.3
N16801277: length 1.3
  TOP w0.15: C6.2 C7.2 6.05,13.31 U2.1
N16801301: length 15.2
  TOP w0.15: C15.2 7.14,13.31 6.99,13.46 v1(6.99,13.47) 6.83,13.31 ; 6.93,13.31 6.83,13.31 ; 6.83,13.31 U2.6 ; R5.2 v1(12.86,4.73)
  VCC w0.15: v1(6.99,13.47) 7.03,13.43 arc(7.41,13.17) 7.85,13.09 11.13,13.09 arc(11.83,12.94) 12.43,12.55 arc(12.75,12.07) 12.86,11.52 v1(12.86,4.73)
N16801306: length 1.6
  TOP w0.15: L2.2 C3.2 3.16,12.22 3.14,12.2 L3.1 C4.1
N16801308: length 1.6
  TOP w0.15: C4.2 L3.2 3.23,12.8 L4.1 C5.1
N16801347: length 1.4
  TOP w0.15: U2.4 6.57,12.51 arc(6.65,12.49) 6.71,12.45 6.82,12.34 arc(6.93,12.27) 7.05,12.24 C14.1 R6.1
N16801468: length 0.8
  TOP w0.15: C8.1 7.22,12.83 7.14,12.91 U2.5
N16801497: length 0.6
  TOP w0.15: C6.1 L4.2

## Copper pours and planes (outline as drawn; the poured copper is in the pictures)
GND on TOP: 0.95,0.95 0.95,4.2 1.55,4.2 1.55,1.55 13.95,1.55 13.95,9.65 11.75,9.65 11.75,10.25 14.55,10.25 14.55,0.95
GND on TOP: 9.63,13.19 9.53,13.29 9.53,13.69 9.61,13.77 10.93,13.77 11.1,13.95 11.1,14.58 11.26,14.74 15.35,14.74 15.47,14.61 15.47,13.87 15.37,13.77 14.94,13.77 14.43,13.26 12.6,13.26 12.32,13.54 11.51,13.54 11.15,13.19
GND on TOP: 0.95,9.66 0.95,14.55 10.73,14.55 10.73,13.95 1.55,13.95 1.55,9.66
GND on TOP: 11.71,10.77 11.31,11.18 9.73,11.18 9.48,11.43 9.48,12.22 9.66,12.4 11.18,12.4 11.46,12.12 12.37,12.12 12.6,12.35 14.38,12.35 14.99,11.74 15.4,11.74 15.5,11.64 15.5,10.95 15.32,10.77
GND on BOTTOM: 0,0 0,15.5 2.21,15.5 2.21,14.69 9.1,14.69 9.1,15.5 15.5,15.5 15.5,8.77 14.66,8.77 14.66,8.26 15.5,8.26 15.5,4.04 14.69,4.04 14.69,0 11.84,0 11.84,0.84 5.29,0.84 5.29,0 ; 6 cut-outs
GND on GND: 0,0 0,15.5 15.5,15.5 15.5,0
GND on VCC: 0,0 0,15.5 15.5,15.5 15.5,0 ; 3 cut-outs
VCC_3V3 on TOP: 11.84,1.93 11.69,2.09 11.69,2.67 11.79,2.77 13.19,2.77 13.29,2.67 13.29,2.06 13.16,1.93

Small or netless copper shapes (teardrops, artwork), in the pictures only: 3 on TOP

## Text on the board
Ref Des/Silkscreen Bottom: GND | 3V3 | RX0 | TX0 | BOOT0 | RSTN | RF_ANT
NCLEGEND-1-4: FIGURE | SIZE | 0.2032 | 0.5 | 1.0x0.35 | DRILL CHART: TOP to BOTTOM | ALL UNITS ARE IN MILLIMETERS | TOLERANCE | +0.0762/-0.0762 | +0.0/-0.0 | PLATED | QTY | 93 | 1 | 30 | 2
